# Altium PCB Terminal_Board_PCB V3.PcbDoc
Units mm, origin at the board's own origin, x right, y up, seen from the top; angles counter-clockwise.
Board outline 240.8 x 116.8 mm, 2 copper layers (Top Layer, Bottom Layer 1), stack 0.418 mm thick; 17 components, 37 nets, 96 pads, 39 vias.
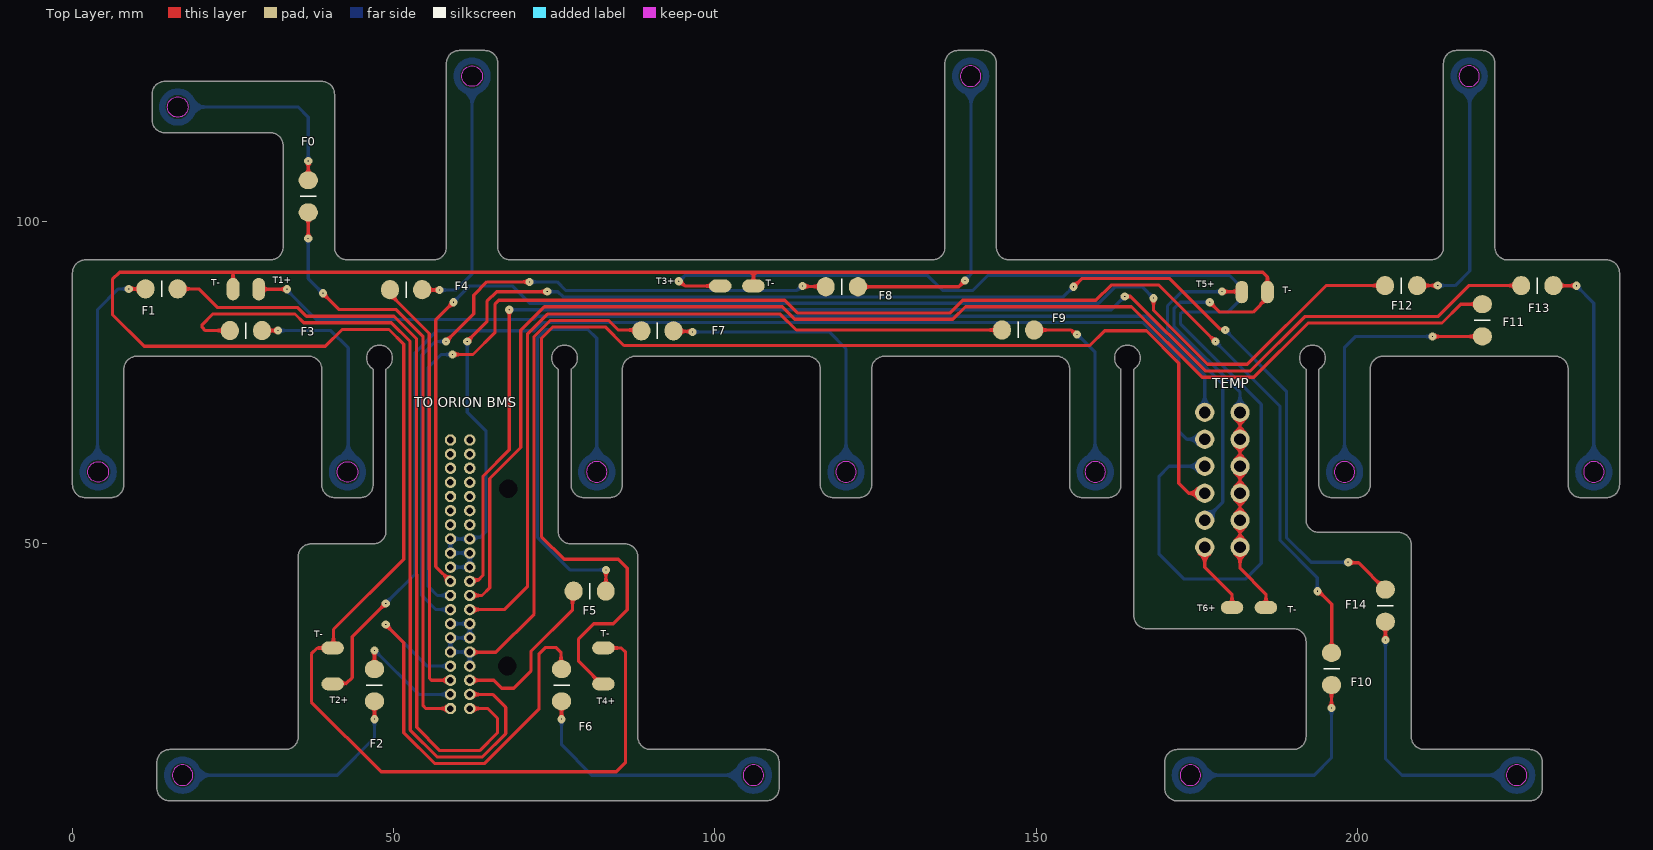
[diagram p0: Top Layer view]
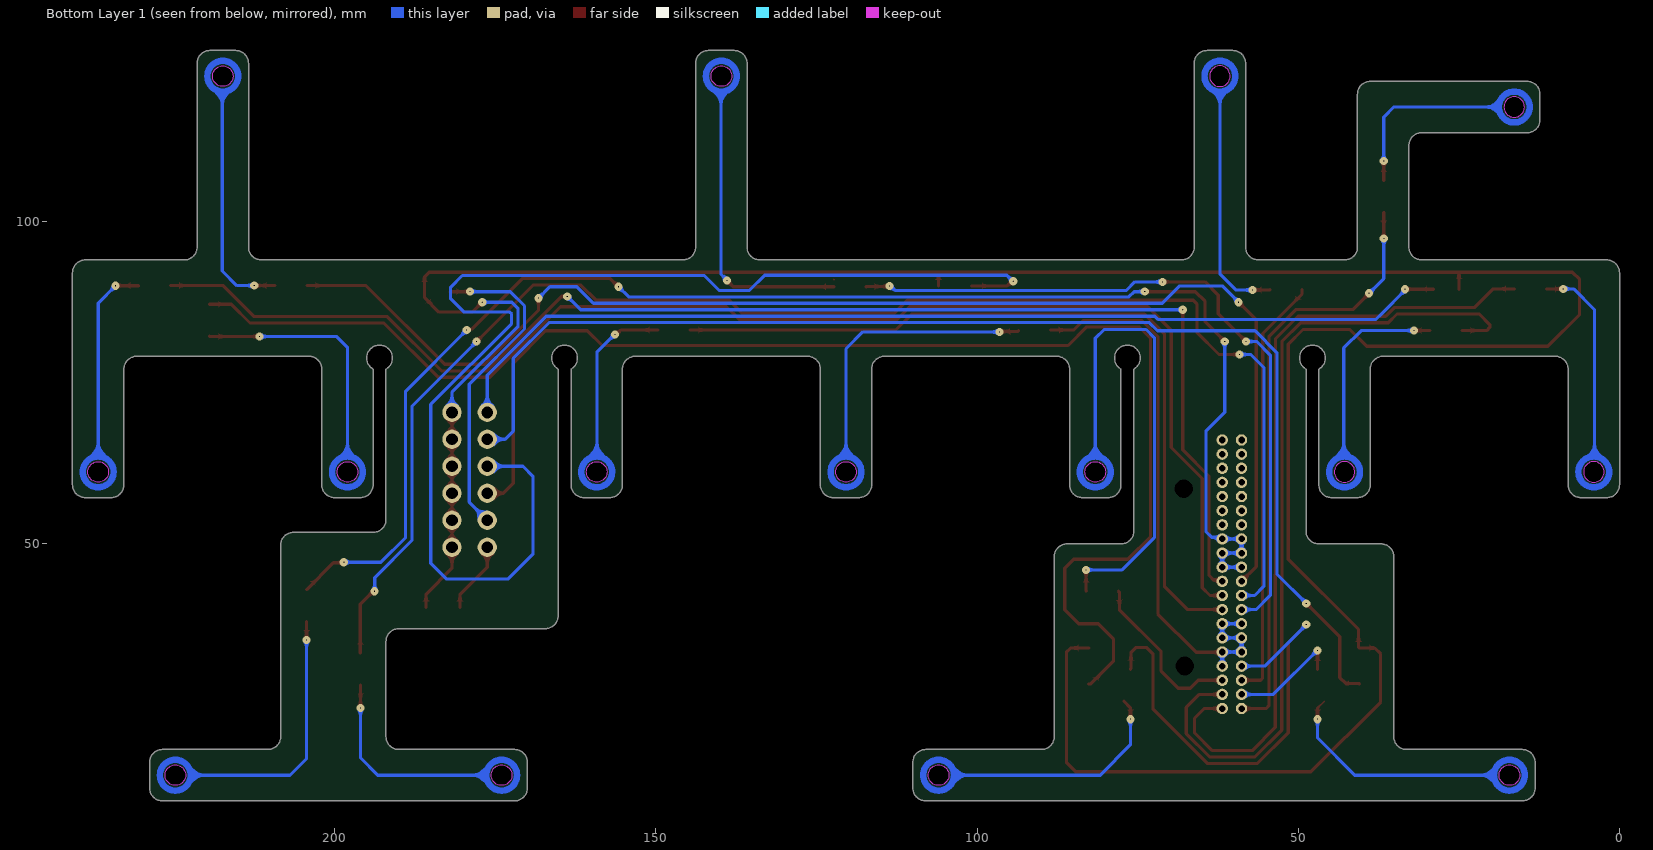
[diagram p1: Bottom Layer 1 view, seen from below]
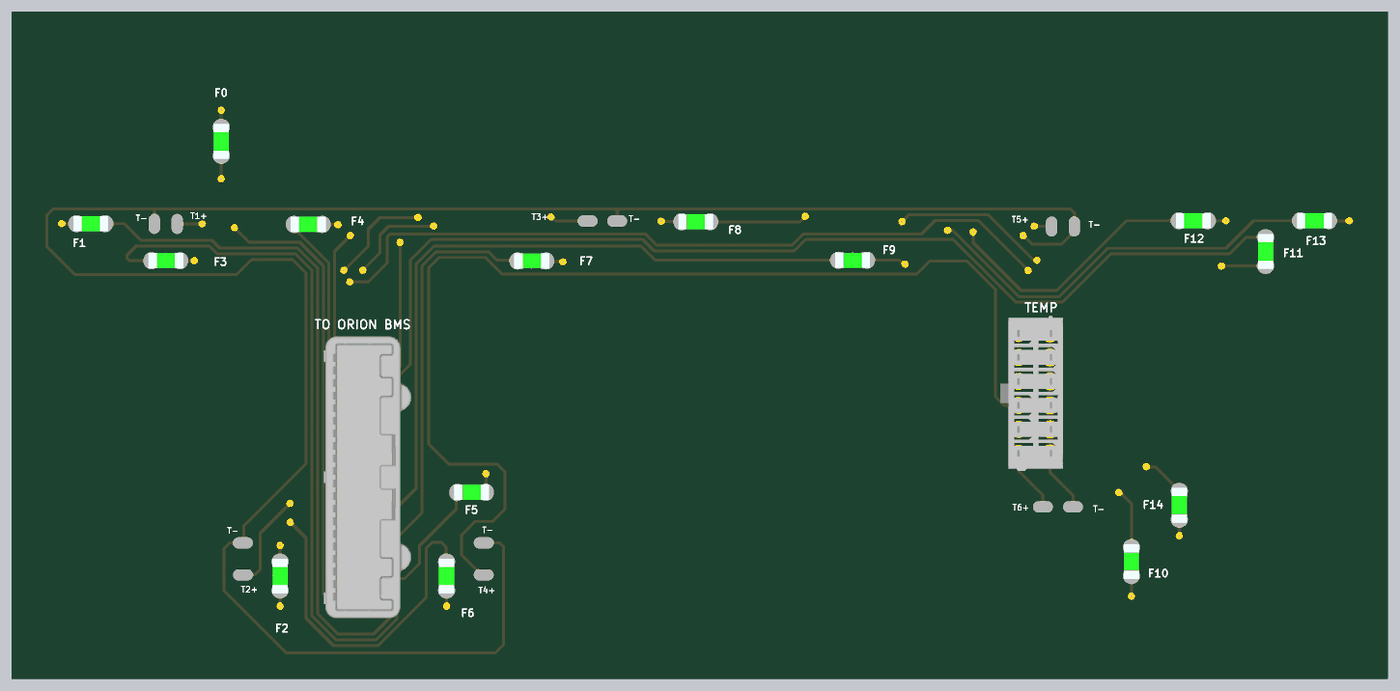
[diagram p2: 3D render of the assembled board from above, using the file's embedded part models]

## Layer stack, top to bottom
Top Solder: solder mask 0.012, FC-001, Dk 4
Top Solder: solder mask 0.0102, Solder Resist, Dk 3.5
Stiffener 1: core 0.2032, Core-024, Dk 4.6
Top Layer: signal copper 0.07
Dielectric 2: prepreg 0.075, R-F775, Dk 3.2
Bottom Layer 1: signal copper 0.07
Main Flex PCB Bottom Coverlay: solder mask 0.0102, Solder Resist, Dk 3.5
Main Flex PCB Bottom Coverlay: solder mask 0.012, FC-001, Dk 4

## Board outline
0.013,59.093 ccw(c2.013,59.093) 2.013,57.093 6.013,57.093 ccw(c6.013,59.093) 7.427,57.679 ccw(c6.013,59.093) 8.013,59.093 8.013,77.093 cw(c10.013,77.093) 10.013,79.093 36.813,79.093 cw(c36.813,77.093) 38.813,77.093 38.813,59.093 ccw(c40.813,59.093) 39.398,57.679 ccw(c40.813,59.093) 40.813,57.093 44.813,57.093 ccw(c44.813,59.093) 46.813,59.093 46.813,77.093 cw(c47.813,78.825) 48.813,77.093 48.813,64.493 48.813,51.893 cw(c46.813,51.893) 46.813,49.893 37.154,49.893 ccw(c37.154,47.893) 35.154,47.893 35.154,19.893 cw(c33.154,19.893) 34.568,18.479 cw(c33.154,19.893) 33.154,17.893 15.154,17.893 ccw(c15.154,15.893) 13.154,15.893 13.154,11.893 ccw(c15.154,11.893) 15.154,9.893 108.003,9.893 ccw(c108.003,11.893) 110.003,11.893 110.003,15.893 ccw(c108.003,15.893) 108.003,17.893 90.003,17.893 cw(c90.003,19.893) 88.003,19.893 88.003,47.893 ccw(c86.003,47.893) 86.003,49.893 77.613,49.893 cw(c77.613,51.893) 75.613,51.893 75.613,64.493 75.613,77.093 cw(c76.613,78.825) 77.613,77.093 77.613,59.093 ccw(c79.613,59.093) 79.613,57.093 83.613,57.093 ccw(c83.613,59.093) 85.027,57.679 ccw(c83.613,59.093) 85.613,59.093 85.613,77.093 cw(c87.613,77.093) 87.613,79.093 114.413,79.093 cw(c114.413,77.093) 116.413,77.093 116.413,59.093 ccw(c118.413,59.093) 116.998,57.679 ccw(c118.413,59.093) 118.413,57.093 122.413,57.093 ccw(c122.413,59.093) 124.413,59.093 124.413,77.093 cw(c126.413,77.093) 126.413,79.093 153.213,79.093 cw(c153.213,77.093) 155.213,77.093 155.213,59.093 ccw(c157.213,59.093) 157.213,57.093 161.213,57.093 ccw(c161.213,59.093) 163.213,59.093 163.213,77.093 cw(c164.213,78.825) 165.213,77.093 165.213,38.693 ccw(c167.213,38.693) 167.213,36.693 190.013,36.693 cw(c190.013,34.693) 192.013,34.693 192.013,27.293 192.013,19.893 cw(c190.013,19.893) 191.427,18.479 cw(c190.013,19.893) 190.013,17.893 172.013,17.893 ccw(c172.013,15.893) 170.013,15.893 170.013,13.893 170.013,11.893 ccw(c172.013,11.893) 170.598,10.479 ccw(c172.013,11.893) 172.013,9.893 226.803,9.893 ccw(c226.803,11.893) 228.217,10.479 ccw(c226.803,11.893) 228.803,11.893 228.803,13.893 228.803,15.893 ccw(c226.803,15.893) 226.803,17.893 210.403,17.893 cw(c210.403,19.893) 208.403,19.893 208.403,49.693 ccw(c206.403,49.693) 207.817,51.108 ccw(c206.403,49.693) 206.403,51.693 194.013,51.693 cw(c194.013,53.693) 192.013,53.693 192.013,77.093 cw(c193.013,78.825) 194.013,77.093 194.013,59.093 ccw(c196.013,59.093) 194.598,57.679 ccw(c196.013,59.093) 196.013,57.093 200.013,57.093 ccw(c200.013,59.093) 202.013,59.093 202.013,77.093 cw(c204.013,77.093) 202.813,78.693 cw(c204.013,77.093) 204.013,79.093 230.813,79.093 cw(c230.813,77.093) 232.813,77.093 232.813,59.093 ccw(c234.813,59.093) 234.813,57.093 238.813,57.093 ccw(c238.813,59.093) 240.813,59.093 240.813,92.093 ccw(c238.813,92.093) 240.227,93.508 ccw(c238.813,92.093) 238.813,94.093 223.413,94.093 cw(c223.413,96.093) 221.413,96.093 221.413,124.693 ccw(c219.412,124.693) 221.145,125.693 ccw(c219.413,124.693) 219.413,126.693 217.413,126.693 215.413,126.693 ccw(c215.413,124.693) 213.413,124.693 213.413,96.093 cw(c211.413,96.093) 211.413,94.093 178.613,94.093 145.813,94.093 cw(c145.813,96.093) 143.813,96.093 143.813,124.693 ccw(c141.813,124.693) 143.227,126.108 ccw(c141.813,124.693) 141.813,126.693 139.813,126.693 137.813,126.693 ccw(c137.813,124.693) 135.813,124.693 135.813,96.093 cw(c133.813,96.093) 133.813,94.093 101.013,94.093 68.213,94.093 cw(c68.213,96.093) 66.213,96.093 66.213,124.693 ccw(c64.213,124.693) 65.627,126.108 ccw(c64.213,124.693) 64.213,126.693 62.213,126.693 60.213,126.693 ccw(c60.213,124.693) 58.798,126.108 ccw(c60.213,124.693) 58.213,124.693 58.213,96.093 cw(c56.213,96.093) 56.213,94.093 49.508,94.093 42.803,94.093 cw(c42.803,96.093) 40.803,96.093 40.803,119.893 ccw(c38.803,119.893) 38.803,121.893 14.403,121.893 ccw(c14.403,119.893) 12.403,119.893 12.403,115.893 ccw(c14.403,115.893) 14.403,113.893 30.803,113.893 cw(c30.803,111.893) 32.803,111.893 32.803,96.093 cw(c30.803,96.093) 30.803,94.093 2.013,94.093 ccw(c2.013,92.093) 0.013,92.093
cut-out: 4.013,59.493 cw(c4.013,61.093) 2.413,61.093 cw(c4.013,61.093) 4.013,62.693 cw(c4.013,61.093) 5.613,61.093 cw(c4.013,61.093)
cut-out: 42.813,59.493 cw(c42.813,61.093) 41.213,61.093 cw(c42.813,61.093) 42.813,62.693 cw(c42.813,61.093) 44.413,61.093 cw(c42.813,61.093)
cut-out: 15.554,13.893 ccw(c17.154,13.893) 17.154,12.293 ccw(c17.154,13.893) 18.754,13.893 ccw(c17.154,13.893) 17.154,15.493 ccw(c17.154,13.893)
cut-out: 104.403,13.893 ccw(c106.003,13.893) 106.003,12.293 ccw(c106.003,13.893) 107.603,13.893 ccw(c106.003,13.893) 106.003,15.493 ccw(c106.003,13.893)
cut-out: 80.013,61.093 ccw(c81.613,61.093) 81.613,59.493 ccw(c81.613,61.093) 83.213,61.093 ccw(c81.613,61.093) 81.613,62.693 ccw(c81.613,61.093)
cut-out: 118.813,61.093 ccw(c120.413,61.093) 120.413,59.493 ccw(c120.413,61.093) 122.013,61.093 ccw(c120.413,61.093) 120.413,62.693 ccw(c120.413,61.093)
cut-out: 157.613,61.093 ccw(c159.213,61.093) 159.213,59.493 ccw(c159.213,61.093) 160.813,61.093 ccw(c159.213,61.093) 159.213,62.693 ccw(c159.213,61.093)
cut-out: 172.413,13.893 ccw(c174.013,13.893) 174.013,12.293 ccw(c174.013,13.893) 175.613,13.893 ccw(c174.013,13.893) 174.013,15.493 ccw(c174.013,13.893)
cut-out: 223.203,13.893 ccw(c224.803,13.893) 224.803,12.293 ccw(c224.803,13.893) 226.403,13.893 ccw(c224.803,13.893) 224.803,15.493 ccw(c224.803,13.893)
cut-out: 196.413,61.093 ccw(c198.013,61.093) 198.013,59.493 ccw(c198.013,61.093) 199.613,61.093 ccw(c198.013,61.093) 198.013,62.693 ccw(c198.013,61.093)
cut-out: 235.213,61.093 ccw(c236.813,61.093) 236.813,59.493 ccw(c236.813,61.093) 238.413,61.093 ccw(c236.813,61.093) 236.813,62.693 ccw(c236.813,61.093)
cut-out: 215.813,122.693 ccw(c217.413,122.693) 217.413,121.093 ccw(c217.413,122.693) 219.013,122.693 ccw(c217.413,122.693) 217.413,124.293 ccw(c217.413,122.693)
cut-out: 138.213,122.693 ccw(c139.813,122.693) 139.813,121.093 ccw(c139.813,122.693) 141.413,122.693 ccw(c139.813,122.693) 139.813,124.293 ccw(c139.813,122.693)
cut-out: 62.213,121.093 cw(c62.213,122.693) 60.613,122.693 cw(c62.213,122.693) 62.213,124.293 cw(c62.213,122.693) 63.813,122.693 cw(c62.213,122.693)
cut-out: 16.403,116.293 cw(c16.403,117.893) 14.803,117.893 cw(c16.403,117.893) 16.403,119.493 cw(c16.403,117.893) 18.003,117.893 cw(c16.403,117.893)
board region "BMS Header Stiffener": 51.813,74.155 51.813,18.783 72.613,18.783 72.613,74.155
board region "Temp Board Stiffener": 170.213,43.675 187.013,43.675 187.013,76.822 170.213,76.822
board region "Layer Stack Region 1": 826 vertices, not listed, extent 0.013,9.893 240.813,126.693

## Design rules (kind name [scope] priority, off if disabled: settings)
Clearance "Terminal Board Clearance" [All] p1: gap=0.254 ignorepadtopadclearanceinfootprint=FALSE except(0: Arc-Hole Track-Hole SMDPad-Hole THPad-Hole Via-Hole Fill-Fill Fill-Poly Fill-Region Fill-Text Fill-Hole Poly-Poly Poly-Region Poly-Text Poly-Hole Region-Region Region-Text Region-Hole Text-Hole; 0.5: Arc-Arc Arc-Track Track-Track)
Clearance [All] p2: gap=0.254 ignorepadtopadclearanceinfootprint=FALSE except(0: Arc-Hole Track-Hole SMDPad-Hole THPad-Hole Via-Hole Fill-Hole Poly-Hole Region-Hole Text-Hole; 0.1: THPad-THPad; 0.152: Arc-SMDPad Track-SMDPad SMDPad-SMDPad; 0.2: Arc-THPad Track-THPad SMDPad-THPad THPad-Via; 0.203: Arc-Arc Arc-Track Arc-Region Track-Track Track-Region SMDPad-Region THPad-Region Via-Region Fill-Region Poly-Region Region-Region; 0.6: Arc-Poly Track-Poly SMDPad-Poly THPad-Poly Via-Poly Fill-Poly Poly-Poly)
DiffPairsRouting [All] p1: maxlimit=0.254 minlimit=0.254 mostfreqgap=0.254 toplayer_minwidth=0.381 toplayer_maxwidth=0.381 toplayer_prefwidth=0.381 bottomlayer_minwidth=0.381 bottomlayer_maxwidth=0.381 bottomlayer_prefwidth=0.381 substack1={0A3D3CD8-3E21-4DB5-9F74-4A8A07FAF6CB} toplayer_{0a3d3cd8-3e21-4db5-9f74-4a8a07faf6cb}_minwidth=0.381 toplayer_{0a3d3cd8-3e21-4db5-9f74-4a8a07faf6cb}_maxwidth=0.381 toplayer_{0a3d3cd8-3e21-4db5-9f74-4a8a07faf6cb}_prefwidth=0.381 bottomlayer_{0a3d3cd8-3e21-4db5-9f74-4a8a07faf6cb}_minwidth=0.381 bottomlayer_{0a3d3cd8-3e21-4db5-9f74-4a8a07faf6cb}_maxwidth=0.381 bottomlayer_{0a3d3cd8-3e21-4db5-9f74-4a8a07faf6cb}_prefwidth=0.381 maxuncoupledlength=12.7
Height [All] p1: minheight=0 maxheight=50 prefheight=12.7
HoleSize [All] p1: absolutevalues=TRUE maxlimit=10 minlimit=0.025 maxpercent=80.000 minpercent=20.000
PlaneClearance [All] p1: clearance=0.4
PlaneConnect [All] p1: pad.planeconnectstyle=Relief pad.reliefexpansion=0.508 pad.reliefentries=4 pad.reliefconductorwidth=0.8 pad.reliefairgap=0.254 via.planeconnectstyle=Direct via.reliefexpansion=0.508 via.reliefentries=4 via.reliefconductorwidth=0.8 via.reliefairgap=0.254
PolygonConnect [All] p1: thpad.connectstyle=Relief thpad.reliefconductorwidth=0.6 thpad.reliefentries=4 thpad.polygonreliefangle="90 Angle" thpad.airgapwidth=0.254 smdpad.connectstyle=Relief smdpad.reliefconductorwidth=0.6 smdpad.reliefentries=4 smdpad.polygonreliefangle="90 Angle" smdpad.airgapwidth=0.254 via.connectstyle=Direct via.reliefconductorwidth=0.6 via.reliefentries=4 via.polygonreliefangle="90 Angle" via.airgapwidth=0.254
RoutingVias [All] p1: holewidth=0.711 width=1.27 viastyle="Through Hole" minholewidth=0.203 minwidth=0.254 maxholewidth=0.711 maxwidth=1.27
SolderMaskExpansion [All] p1: expansion=0.051 istentingtop=FALSE
Width [All] p1: maxlimit=3 minlimit=0.127 preferedwidth=0.5 substack1={0A3D3CD8-3E21-4DB5-9F74-4A8A07FAF6CB}
25 further rules are at their usual default settings.

## Components (designator, comment, footprint, x,y, rotation, side; value= is the part's Value field where it differs from the comment)
F0 "0451.750MRL" FUSC6127X269N#1 36.716,103.993 r270 top
F1 "0451.750MRL" FUSC6127X269N#1 13.886,89.585 r0 top
F2 "0451.750MRL" FUSC6127X269N#1 47.013,27.893 r90 top
F3 "0451.750MRL" FUSC6127X269N#1 27.013,83.093 r180 top
F4 "0451.750MRL" FUSC6127X269N#1 51.931,89.46 r180 top
F5 "0451.750MRL" FUSC6127X269N#1 80.518,42.545 r180 top
F6 "0451.750MRL" FUSC6127X269N#2 76.144,27.893 r90 top
F7 "0451.750MRL" FUSC6127X269N#1 91.059,83.058 r180 top
F8 "0451.750MRL" FUSC6127X269N#1 119.761,89.916 r180 top
F9 "0451.750MRL" FUSC6127X269N#1 147.193,83.185 r180 top
F10 "0451.750MRL" FUSC6127X269N#1 195.986,30.429 r90 top
F11 "0451.750MRL" FUSC6127X269N#1 219.469,84.696 r90 top
F12 "0451.750MRL" FUSC6127X269N#1 206.813,90.093 r180 top
F13 "0451.750MRL" FUSC6127X269N#1 228.013,90.093 r180 top
F14 "0451.750MRL" FUSC6127X269N#1 204.368,40.284 r90 top
TEMP "39293126" 39293126 181.75,70.372 r90 top
"TO ORION BMS" "1376113-6" 1376113-6 61.849,46.265 r90 top

## Footprints (in the part's own frame and the unit in brackets; to place one, negate y for a bottom-side part, rotate by r counter-clockwise, add the part's x,y. Pads: shape width x height; smd on the part's side, far side on the other; paste and mask are expansions set on the pad)
1376113-6 [mil]
  round 0 hole 114.49 unplated: 0(-605,-230) 0(480,-235)
  round 70 hole 40: 1(-866.14,118.11) 2(-866.14,0) 3(-779.53,118.11) 4(-779.53,0) 5(-692.91,118.11) 6(-692.91,0) 7(-606.3,118.11) 8(-606.3,0) 9(-519.68,118.11) 10(-519.68,0) 11(-433.07,118.11) 12(-433.07,0) 13(-346.46,118.11) 14(-346.46,0) 15(-259.84,118.11) 16(-259.84,0) 17(-173.23,118.11) 18(-173.23,0) 19(-86.61,118.11) 20(-86.61,0) 21(0,118.11) 22(0,0) 23(86.61,118.11) 24(86.61,0) 25(173.23,118.11) 26(173.23,0) 27(259.84,118.11) 28(259.84,0) 29(346.46,118.11) 30(346.46,0) 31(433.07,118.11) 32(433.07,0) 33(519.69,118.11) 34(519.69,0) 35(606.3,118.11) 36(606.3,0) 37(692.91,118.11) 38(692.91,0) 39(779.53,118.11) 40(779.53,0)
  body extent -1015,-321 930,281, height 940
39293126 [mm]
  round 3 hole 1.85: 1(0,0) 2(0,5.5) 3(-4.2,0) 4(-4.2,5.5) 5(-8.4,0) 6(-8.4,5.5) 7(-12.6,0) 8(-12.6,5.5) 9(-16.8,0) 10(-16.8,5.5) 11(-21,0) 12(-21,5.5)
  body extent -24.1,-2.3 3.1,8.7, height 2.99
FUSC6127X269N#1 [mm]
  rrect100% 2.8x3 smd: 1(-2.5,0) 2(2.5,0)
  silkscreen extent 0,-1.24 0,1.24, body extent -3.05,-1.35 3.05,1.35, height 2.69
FUSC6127X269N#2 [mm]
  rrect100% 2.8x3 smd paste+0: 1(-2.5,0)
  rrect100% 2.8x3 smd: 2(2.5,0)
  silkscreen extent 0,-1.24 0,1.24, body extent -3.05,-1.35 3.05,1.35, height 2.69

## Part data
F0 F1 F2 F3 F4 F5 F6 F7 F8 F9 F10 F11 F12 F13 F14: "Fuse", Manufacturer_Name=LITTELFUSE, Arrow Part Number=0451.750MRL, Arrow Price/Stock=https://www.arrow.com/en/products/0451.750mrl/littelfuse, Datasheet Link=http://www.farnell.com/datasheets/88908.pdf, Height=2.69mm, Manufacturer_Part_Number=0451.750MRL
TEMP: Digikey Part Number=WM3848-ND, Angle=0, Contact=Tin, Flange=No, Part Number=39293126, Pitch=4.2mm, Positions=12, Row Spacing=5.5mm
"TO ORION BMS": Digikey Part Number=1376113-6-ND, Angle=180, Contact=Gold, Digikey Link=https://www.digikey.com.au/products/en?keywords=1376113-6, Flange=na, Part Number=1376113-6, Pitch=3, Positions=40, Row Spacing=2.2

## Free pads (board coordinates)
  oval 2x3.5 smd: 2(25.013,89.535) 2(29.013,89.535) 2(182.013,89.093) 2(186.013,89.093)
  oval 3.5x2 smd: 2(40.513,28.093) 2(40.513,33.693) 2(82.644,28.093) 2(82.644,33.693) 2(100.838,90.043) 2(105.996,90.043) 2(180.5,40) 2(185.769,40)

## Via types
v1: diameter 1.27, hole 0, Top Layer to Bottom Layer 1, 39 vias

## Nets (pads, with @x,y where several pads share a name; then routed paths per layer and width w, separated by ;. In a path a pad name is that pad's centre, name@x,y a point inside that pad or via, vN(x,y) a via of type N, cw(c..) or ccw(c..) an arc to the next point about the centre after c; other vN are vias at no path point)
Tap0: "TO ORION BMS.1" F0.2 | length 93.9
  Top Layer w0.5: v1(36.703,97.409) 36.709,97.415 36.709,101.487 F0.2 ; v1(38.989,88.9) 41.529,86.36 50.427,86.36 54.562,82.225 54.562,45.524 54.587,45.498 54.587,24.669 54.991,24.265 58.849,24.265
  Bottom Layer 1 w0.5: v1(36.703,97.409) 36.703,91.186 v1(38.989,88.9)
Tap1: "TO ORION BMS.2" F1.2 | length 123.3
  Top Layer w0.5: F1.2 19.685,89.585 22.597,86.674 35.068,86.674 36.424,85.319 50.054,85.319 53.562,81.811 53.562,45.109 53.587,45.084 53.587,21.326 57.191,17.723 63.383,17.723 66.167,20.507 66.167,22.733 64.635,24.265 61.849,24.265
Tap2: "TO ORION BMS.3" F2.2 | length 17.5
  Top Layer w0.5: F2.2 v1(47.013,33.274)
  Bottom Layer 1 w0.5: v1(47.013,33.274) 47.097,33.274 53.906,26.465 58.849,26.465
Tap3: "TO ORION BMS.4" F3.2 | length 128.9
  Top Layer w0.5: F3.2 20.701,83.093 20.183,83.611 20.183,84.026 21.831,85.674 34.65,85.674 36.005,84.319 49.64,84.319 52.562,81.397 52.562,44.695 52.587,44.67 52.587,20.912 56.777,16.723 63.797,16.723 67.437,20.363 67.437,24.433 65.405,26.465 61.849,26.465
Tap4: "TO ORION BMS.5" F4.2 | length 66.4
  Top Layer w0.5: F4.2 49.431,88.771 55.562,82.639 55.562,45.938 55.587,45.912 55.587,28.958 55.88,28.665 58.849,28.665
Tap5: "TO ORION BMS.6" F5.2 | length 26.3
  Top Layer w0.5: 61.849,28.665 65.569,28.665 66.802,27.432 68.707,27.432 71.374,30.099 71.374,33.147 77.851,39.624 77.851,42.378 F5.2
Tap6: "TO ORION BMS.7" F6.2 | length 72.7
  Top Layer w0.5: v1(48.768,37.338) 51.587,34.519 51.587,20.498 56.363,15.723 64.211,15.723 72.613,24.124 72.613,32.735 73.66,33.782 75.22,33.782 76.063,32.939 76.063,30.475 F6.2
  Bottom Layer 1 w0.5: v1(48.768,37.338) 55.241,30.865 58.849,30.865
Tap7: "TO ORION BMS.8" "TO ORION BMS.9" "TO ORION BMS.10" "TO ORION BMS.11" "TO ORION BMS.12" "TO ORION BMS.13" "TO ORION BMS.14" F7.2 | length 89.6
  Top Layer w0.5: 61.849,33.065 61.894,33.02 65.913,33.02 71.857,38.964 71.857,82.171 74.353,84.668 83.479,84.668 84.961,83.185 F7.2@88.559,83.185
  Bottom Layer 1 w0.5: 58.849,37.465 61.849,37.465 61.849,35.265 58.849,35.265 58.849,33.065 61.849,33.065 61.849,30.865
Tap8: "TO ORION BMS.15" F8.2 | length 113
  Top Layer w0.5: v1(58.166,81.407) 62.459,85.7 62.459,88.621 64.516,90.678 v1(71.164,90.678) ; v1(113.665,90.018) 113.716,89.967 117.21,89.967 F8.2
  Bottom Layer 1 w0.5: v1(58.166,81.407) 56.515,81.407 54.356,79.248 54.356,41.91 56.601,39.665 58.849,39.665 ; v1(71.164,90.678) 75.443,90.678 76.79,89.332 112.771,89.332 113.457,90.018 v1(113.665,90.018)
Tap9: "TO ORION BMS.16" F9.2 | length 125.9
  Top Layer w0.5: 61.849,39.665 67.224,39.665 70.857,43.298 70.857,82.586 73.939,85.668 110.208,85.668 112.691,83.185 F9.2
Tap10: "TO ORION BMS.17" F10.2 | length 229.9
  Top Layer w0.5: v1(59.182,79.375) 62.357,79.375 65.786,82.804 65.786,87.249 66.338,87.801 110.903,87.801 112.852,85.852 136.652,85.852 138.601,87.801 159.302,87.801 161.671,90.17 169.134,90.17 v1(177.927,81.377) ; v1(193.777,42.52) 193.98,42.52 196.013,40.487 F10.2@196.013,32.929
  Bottom Layer 1 w0.5: 58.849,41.865 56.814,41.865 55.372,43.307 55.372,77.343 57.404,79.375 v1(59.182,79.375) ; v1(177.927,81.377) 187.96,71.344 187.96,50.47 193.777,44.653 v1(193.777,42.52)
Tap11: "TO ORION BMS.18" F11.2 | length 207.8
  Top Layer w0.5: 61.849,41.865 63.76,41.865 64.973,43.078 64.973,60.071 69.799,64.897 69.799,83.134 73.466,86.801 110.489,86.801 112.445,84.845 137.06,84.845 139.015,86.801 164.854,86.801 175.836,75.819 183.896,75.819 192.354,84.277 213.182,84.277 216.101,87.196 F11.2
Tap12: "TO ORION BMS.19" F12.2 | length 204.9
  Top Layer w0.5: 58.849,44.065 56.562,46.352 56.562,84.756 v1(59.309,87.503) ; v1(168.275,88.138) 168.275,86.26 176.684,77.851 182.88,77.851 195.122,90.093 F12.2
  Bottom Layer 1 w0.5: v1(59.309,87.503) 61.849,90.043 68.453,90.043 71.164,87.332 159.722,87.332 162.306,89.916 166.497,89.916 v1(168.275,88.138)
Tap13: "TO ORION BMS.20" F13.2 | length 214.1
  Top Layer w0.5: 61.849,44.065 62.047,44.263 63.161,44.263 63.906,45.009 63.906,60.427 67.996,64.516 v1(67.996,86.335) ; v1(163.805,88.417) 163.834,88.388 164.733,88.388 176.299,76.822 183.375,76.822 191.83,85.277 212.531,85.277 217.347,90.093 F13.2
  Bottom Layer 1 w0.5: v1(67.996,86.335) 70.747,86.335 70.75,86.332 161.719,86.332 v1(163.805,88.417)
Tap14: "TO ORION BMS.21" "TO ORION BMS.22" "TO ORION BMS.23" "TO ORION BMS.24" "TO ORION BMS.25" "TO ORION BMS.26" F14.2 | length 230.1
  Top Layer w0.5: v1(61.468,81.407) 64.516,84.455 64.516,87.63 66.04,89.154 v1(73.914,89.154) ; v1(155.829,89.916) 157.098,91.185 170.816,91.185 178.669,83.332 179.304,83.332 v1(179.451,83.185) ; v1(198.577,47.041) 198.665,46.953 200.2,46.953 F14.2
  Bottom Layer 1 w0.5: 58.849,46.265 61.849,46.265 61.849,48.465 58.849,48.465 58.849,50.665 61.849,50.665 62.094,50.91 63.483,50.91 64.389,51.816 64.389,67.437 61.468,70.358 v1(61.468,81.407) ; v1(73.914,89.154) 75.553,89.154 76.375,88.332 154.245,88.332 v1(155.829,89.916) ; v1(179.451,83.185) 188.96,73.676 188.96,50.884 192.803,47.041 v1(198.577,47.041)
TEMP1+: pad.2@29.013,89.535 TEMP.2 | length 159.1
  Top Layer w0.5: pad.2@29.013,89.535 v1(33.401,89.535)
  Bottom Layer 1 w0.5: v1(33.401,89.535) 33.401,89.347 37.023,85.725 37.912,84.836 71.865,84.836 72.361,85.332 167.06,85.332 176.25,76.142 TEMP.2
TEMP2+: pad.2@40.513,28.093 TEMP.4 | length 197.1
  Top Layer w0.5: pad.2@40.513,28.093 40.596,28.176 42.654,28.176 43.561,29.083 43.561,35.433 v1(48.768,40.64)
  Bottom Layer 1 w0.5: v1(48.768,40.64) 53.34,45.212 53.34,79.654 56.744,83.058 71.933,83.058 73.207,84.332 166.646,84.332 172.212,78.765 172.212,67.442 173.482,66.172 TEMP.4
TEMP3+: pad.2@100.838,90.043 TEMP.6 | length 192.1
  Top Layer w0.5: v1(94.386,90.78) 94.595,90.78 95.331,90.043 pad.2@100.838,90.043
  Bottom Layer 1 w0.5: v1(94.386,90.78) 94.465,90.78 95.405,91.719 133.071,91.719 135.458,89.332 140.132,89.332 142.469,91.669 180.111,91.669 181.991,89.789 181.991,88.138 179.832,85.979 172.752,85.979 172.459,85.686 172.459,84.175 185.039,71.595 185.039,46.863 182.626,44.45 172.974,44.45 169.139,48.285 169.139,60.427 170.684,61.972 TEMP.6
TEMP4+: pad.2@82.644,28.093 TEMP.8 | length 198.5
  Top Layer w0.5: pad.2@82.644,28.093 82.3,28.093 78.791,31.602 78.791,35.103 81.153,37.465 84.201,37.465 86.36,39.624 86.36,46.101 84.963,47.498 76.527,47.498 73,51.026 73,81.864 74.803,83.668 82.956,83.668 85.852,80.772 158.369,80.772 160.655,83.058 167.183,83.058 172.212,78.029 172.212,59.309 173.749,57.772 TEMP.8
TEMP5+: pad.2@182.013,89.093 TEMP.10 | length 50.6
  Top Layer w0.5: v1(178.943,89.154) 181.952,89.154 pad.2@182.013,89.093
  Bottom Layer 1 w0.5: TEMP.10 179.07,56.393 179.07,74.736 170.459,83.346 170.459,86.928 172.686,89.154 v1(178.943,89.154)
TEMP6+: pad.2@180.5,40 TEMP.12 | length 11.1
  Top Layer w0.5: TEMP.12 176.25,46.254 180.5,42.004 pad.2@180.5,40
TEMPGND: pad.2@25.013,89.535 pad.2@40.513,33.693 pad.2@82.644,33.693 pad.2@105.996,90.043 pad.2@185.769,40 pad.2@186.013,89.093 TEMP.1 TEMP.3 TEMP.5 TEMP.7 TEMP.9 TEMP.11 | length 450.3
  Top Layer w0.254: TEMP.11 TEMP.9 TEMP.7 TEMP.5 TEMP.3 TEMP.1
  Top Layer w0.5: pad.2@25.013,89.535 25.013,92.174 ; pad.2@82.644,33.693 85.433,33.693 86.106,33.02 86.106,15.875 84.658,14.427 48.057,14.427 37.211,25.273 37.211,32.766 38.138,33.693 40.513,33.693 40.64,33.821 40.64,36.576 51.562,47.498 51.562,80.983 49.283,83.261 41.986,83.261 39.37,80.645 11.176,80.645 6.223,85.598 6.223,91.059 7.349,92.185 25.013,92.185 106.013,92.185 ; pad.2@105.996,90.043 106.013,92.185 ; v1(177.038,87.503) 178.562,85.979 183.769,85.979 186.013,88.223 186.013,91.482 185.31,92.185 106.013,92.185 ; TEMP.11 181.75,46.088 185.769,42.069 pad.2@185.769,40
  Bottom Layer 1 w0.5: v1(177.038,87.503) 172.449,87.503 171.459,86.514 171.459,83.761 181.75,73.47 TEMP.1
ToBusbar0: F0.1 | length 43.5
  Top Layer w0.5: F0.1 v1(36.716,109.474)
  Bottom Layer 1 w0.5: 18.803,117.893 35.142,117.893 36.716,116.319 v1(36.716,109.474)
  Bottom Layer 1 w1: 18.803,117.893 ccw(c16.403,117.893) 18.803,117.893
ToBusbar1: F1.1 | length 46.8
  Top Layer w0.5: v1(8.776,89.585) F1.1
  Bottom Layer 1 w0.5: 3.912,63.455 3.912,86.335 7.162,89.585 v1(8.776,89.585)
  Bottom Layer 1 w1: 6.413,61.093 ccw(c4.013,61.093) 6.413,61.093
ToBusbar2: F2.1 | length 51.1
  Top Layer w0.254: F2.1@45.987,25.367 F2.1@47.013,24.341
  Top Layer w0.5: v1(47.013,22.606) F2.1@47.013,24.341
  Bottom Layer 1 w0.5: 19.454,13.893 41.224,13.893 47.013,19.683 v1(47.013,22.606)
  Bottom Layer 1 w1: 19.554,13.893 ccw(c17.154,13.893) 19.554,13.893
ToBusbar3: F3.1 | length 46.4
  Top Layer w0.5: F3.1 v1(32.017,83.093)
  Bottom Layer 1 w0.5: v1(32.017,83.093) 40.224,83.093 42.926,80.391 42.926,63.598
  Bottom Layer 1 w1: 45.213,61.093 ccw(c42.813,61.093) 45.213,61.093
ToBusbar4: F4.1 | length 52.3
  Top Layer w0.5: F4.1 54.462,89.429 57.124,89.429 v1(57.155,89.397)
  Bottom Layer 1 w0.5: v1(57.155,89.397) 59.679,89.397 62.213,91.931 62.213,120.293
  Bottom Layer 1 w1: 64.613,122.693 ccw(c62.213,122.693) 64.613,122.693
ToBusbar5: F5.1 | length 90.9
  Top Layer w0.5: F5.1 83.038,42.565 83.038,45.827 v1(83.058,45.847)
  Bottom Layer 1 w0.5: 81.613,63.493 81.613,81.887 80.239,83.261 73.711,83.261 72.415,81.966 72.415,50.876 77.445,45.847 v1(83.058,45.847)
  Bottom Layer 1 w1: 84.013,61.093 ccw(c81.613,61.093) 84.013,61.093
ToBusbar6: F6.1 | length 51.8
  Top Layer w0.5: v1(76.144,22.606) 76.144,24.394 F6.1@77.144,25.393
  Bottom Layer 1 w0.5: v1(76.144,22.606) 76.144,18.598 80.849,13.893 103.685,13.893
  Bottom Layer 1 w1: 108.403,13.893 ccw(c106.003,13.893) 108.403,13.893
ToBusbar7: F7.1 | length 60
  Top Layer w0.5: F7.1 93.646,82.971 96.436,82.971 v1(96.523,82.883)
  Bottom Layer 1 w0.5: v1@96.228,82.883 117.777,82.883 120.413,80.247 120.413,63.614
  Bottom Layer 1 w1: 122.813,61.093 ccw(c120.413,61.093) 122.813,61.093
ToBusbar8: F8.1 | length 62
  Top Layer w0.254: F8.1@122.261,91.009 F8.1@122.3,91.048
  Top Layer w0.5: F8.1 137.968,89.916 v1(138.938,90.886)
  Bottom Layer 1 w0.5: v1(138.938,90.886) 138.938,90.965 139.878,91.905 139.878,120.294
  Bottom Layer 1 w1: 142.213,122.693 ccw(c139.813,122.693) 142.213,122.693
ToBusbar9: F9.1 | length 42.2
  Top Layer w0.5: F9.1 155.443,83.185 155.981,82.647 156.24,82.647 v1(156.388,82.499)
  Bottom Layer 1 w0.5: v1(156.388,82.499) 159.182,79.705 159.182,63.493 159.182,63.488
  Bottom Layer 1 w1: 159.182,63.493 ccw(c159.213,61.093) 161.613,61.093 ccw(c159.213,61.093) 159.182,63.493
ToBusbar10: F10.1 | length 47.2
  Top Layer w0.5: v1(195.986,24.333) F10.1
  Bottom Layer 1 w0.5: 176.313,13.893 176.413,13.893 193.282,13.893 195.986,16.598 v1(195.986,24.333)
  Bottom Layer 1 w1: 176.413,13.893 ccw(c174.013,13.893) 176.413,13.893
ToBusbar11: F11.1 | length 54.1
  Top Layer w0.5: v1(211.722,82.156) 211.742,82.176 219.449,82.176 F11.1
  Bottom Layer 1 w0.5: 198.013,63.614 198.013,80.512 199.657,82.156 v1(211.722,82.156)
  Bottom Layer 1 w1: 200.413,61.093 ccw(c198.013,61.093) 200.413,61.093
ToBusbar12: F12.1 | length 52
  Top Layer w0.5: F12.1 v1(212.518,90.093)
  Bottom Layer 1 w0.5: v1(212.518,90.093) 215.214,90.093 217.491,92.371 217.491,120.129
  Bottom Layer 1 w1: 219.813,122.693 ccw(c217.413,122.693) 219.813,122.693
ToBusbar13: F13.1 | length 46.1
  Top Layer w0.5: F13.1 230.525,90.081 234.099,90.081 v1(234.112,90.068)
  Bottom Layer 1 w0.5: v1(234.112,90.068) 236.813,87.368 236.813,63.741
  Bottom Layer 1 w1: 239.213,61.093 ccw(c236.813,61.093) 239.213,61.093
ToBusbar14: F14.1 | length 55.5
  Top Layer w0.5: v1(204.368,34.937) F14.1
  Bottom Layer 1 w0.5: v1@204.368,35.123 204.368,16.485 206.96,13.893 222.263,13.893
  Bottom Layer 1 w1: 227.203,13.893 ccw(c224.803,13.893) 227.203,13.893
pads on no net: "TO ORION BMS.0" "TO ORION BMS.27" "TO ORION BMS.28" "TO ORION BMS.29" "TO ORION BMS.30" "TO ORION BMS.31" "TO ORION BMS.32" "TO ORION BMS.33" "TO ORION BMS.34" "TO ORION BMS.35" "TO ORION BMS.36" "TO ORION BMS.37" "TO ORION BMS.38" "TO ORION BMS.39" "TO ORION BMS.40"

## Polygon pours and split planes (outlines as drawn)
no net on Layer0 "Default Coverlay 1 Top" (split plane): 788 vertices, not listed, extent 0.013,9.893 240.813,126.693
no net on Layer0 "Default Coverlay 1 Bottom" (split plane): 788 vertices, not listed, extent 0.013,9.893 240.813,126.693

## Silkscreen, mask and mechanical layers (free items; w line width, h text height)
Top Overlay:
  text "T1+" at 31.179,90.477 h1
  text "T3+" at 90.909,90.299 h1
  text "T-" at 21.643,90.096 h1
  text "T-" at 107.889,89.956 h1
  text "T5+" at 174.932,89.842 h1
  text "T-" at 188.407,88.94 h1
  text "T6+" at 175.059,39.423 h1
  text "T-" at 189.156,39.169 h1
  text "T-" at 82.235,35.473 h1
  text "T-" at 37.645,35.359 h1
  text "T2+" at 40.058,25.072 h1
  text "T4+" at 81.6,24.932 h1
Mechanical 1:
  circle w0.013: c224.803,13.893 r1.6
  circle w0.013: c174.013,13.893 r1.6
  circle w0.013: c106.003,13.893 r1.6
  circle w0.013: c17.154,13.893 r1.6
  circle w0.013: c217.413,122.693 r1.6
  circle w0.013: c139.813,122.693 r1.6
  circle w0.013: c16.403,117.893 r1.6
  circle w0.013: c62.213,122.693 r1.6
  circle w0.013: c236.813,61.093 r1.6
  circle w0.013: c198.013,61.093 r1.6
  circle w0.013: c159.213,61.093 r1.6
  circle w0.013: c120.413,61.093 r1.6
  circle w0.013: c81.613,61.093 r1.6
  circle w0.013: c42.813,61.093 r1.6
  circle w0.013: c4.013,61.093 r1.6
  lines w0.013: 68.213,94.093 cw(c68.213,96.093) 66.213,96.093 66.213,124.693 ccw(c64.213,124.693) 64.213,126.693 60.213,126.693 ccw(c60.213,124.693) 58.213,124.693 58.213,96.093 cw(c56.213,96.093) 56.213,94.093 42.803,94.093 cw(c42.803,96.093) 40.803,96.093 40.803,119.893 ccw(c38.803,119.893) 38.803,121.893 14.403,121.893 ccw(c14.403,119.893) 12.403,119.893 12.403,115.893 ccw(c14.403,115.893) 14.403,113.893 30.803,113.893 cw(c30.803,111.893) 32.803,111.893 32.803,96.093 cw(c30.803,96.093) 30.803,94.093 2.013,94.093 ccw(c2.013,92.093) 0.013,92.093 0.013,59.093 ccw(c2.013,59.093) 2.013,57.093 6.013,57.093 ccw(c6.013,59.093) 8.013,59.093 8.013,77.093 cw(c10.013,77.093) 10.013,79.093 36.813,79.093 cw(c36.813,77.093) 38.813,77.093 38.813,59.093 ccw(c40.813,59.093) 40.813,57.093 44.813,57.093 ccw(c44.813,59.093) 46.813,59.093 46.813,77.093 cw(c47.813,78.825) 48.813,77.093 48.813,51.893 cw(c46.813,51.893) 46.813,49.893 37.154,49.893 ccw(c37.154,47.893) 35.154,47.893 35.154,19.893 cw(c33.154,19.893) 33.154,17.893 15.154,17.893 ccw(c15.154,15.893) 13.154,15.893 13.154,11.893 ccw(c15.154,11.893) 15.154,9.893 108.003,9.893 ccw(c108.003,11.893) 110.003,11.893 110.003,15.893 ccw(c108.003,15.893) 108.003,17.893 90.003,17.893 cw(c90.003,19.893) 88.003,19.893 88.003,47.893 ccw(c86.003,47.893) 86.003,49.893 77.613,49.893 cw(c77.613,51.893) 75.613,51.893 75.613,77.093 cw(c76.613,78.825) 77.613,77.093 77.613,59.093 ccw(c79.613,59.093) 79.613,57.093 83.613,57.093 ccw(c83.613,59.093) 85.613,59.093 85.613,77.093 cw(c87.613,77.093) 87.613,79.093 ; 114.413,79.093 cw(c114.413,77.093) 116.413,77.093 116.413,59.093 ccw(c118.413,59.093) 118.413,57.093 122.413,57.093 ccw(c122.413,59.093) 124.413,59.093 124.413,77.093 ; 126.413,79.093 153.213,79.093 cw(c153.213,77.093) 155.213,77.093 155.213,59.093 ccw(c157.213,59.093) 157.213,57.093 161.213,57.093 ccw(c161.213,59.093) 163.213,59.093 163.213,77.093 cw(c164.213,78.825) 165.213,77.093 165.213,38.693 ccw(c167.213,38.693) 167.213,36.693 190.013,36.693 cw(c190.013,34.693) 192.013,34.693 192.013,19.893 cw(c190.013,19.893) 190.013,17.893 172.013,17.893 ccw(c172.013,15.893) 170.013,15.893 170.013,11.893 ccw(c172.013,11.893) 172.013,9.893 226.803,9.893 ccw(c226.803,11.893) 228.803,11.893 228.803,15.893 ccw(c226.803,15.893) 226.803,17.893 210.403,17.893 cw(c210.403,19.893) 208.403,19.893 208.403,49.693 ccw(c206.403,49.693) 206.403,51.693 194.013,51.693 cw(c194.013,53.693) 192.013,53.693 192.013,77.093 cw(c193.013,78.825) 194.013,77.093 194.013,59.093 ccw(c196.013,59.093) 196.013,57.093 200.013,57.093 ccw(c200.013,59.093) 202.013,59.093 202.013,77.093 cw(c204.013,77.093) 204.013,79.093 230.813,79.093 cw(c230.813,77.093) 232.813,77.093 232.813,59.093 ccw(c234.813,59.093) 234.813,57.093 238.813,57.093 ccw(c238.813,59.093) 240.813,59.093 240.813,92.093 ccw(c238.813,92.093) 238.813,94.093 223.413,94.093 cw(c223.413,96.093) 221.413,96.093 221.413,124.693 ccw(c219.413,124.693) 219.413,126.693 215.413,126.693 ccw(c215.413,124.693) 213.413,124.693 213.413,96.093 cw(c211.413,96.093) 211.413,94.093 145.813,94.093 cw(c145.813,96.093) 143.813,96.093 143.813,124.693 ccw(c141.813,124.693) 141.813,126.693 137.813,126.693 ccw(c137.813,124.693) 135.813,124.693 135.813,96.093